# Altium PCB PCB1.PcbDoc
Units mil, origin at the board's own origin, x right, y up, seen from the top; angles counter-clockwise.
Board outline 3300 x 3150 mil, 2 copper layers (Top Layer, Bottom Layer); 7 components, 3 nets, 12 pads, 0 vias.
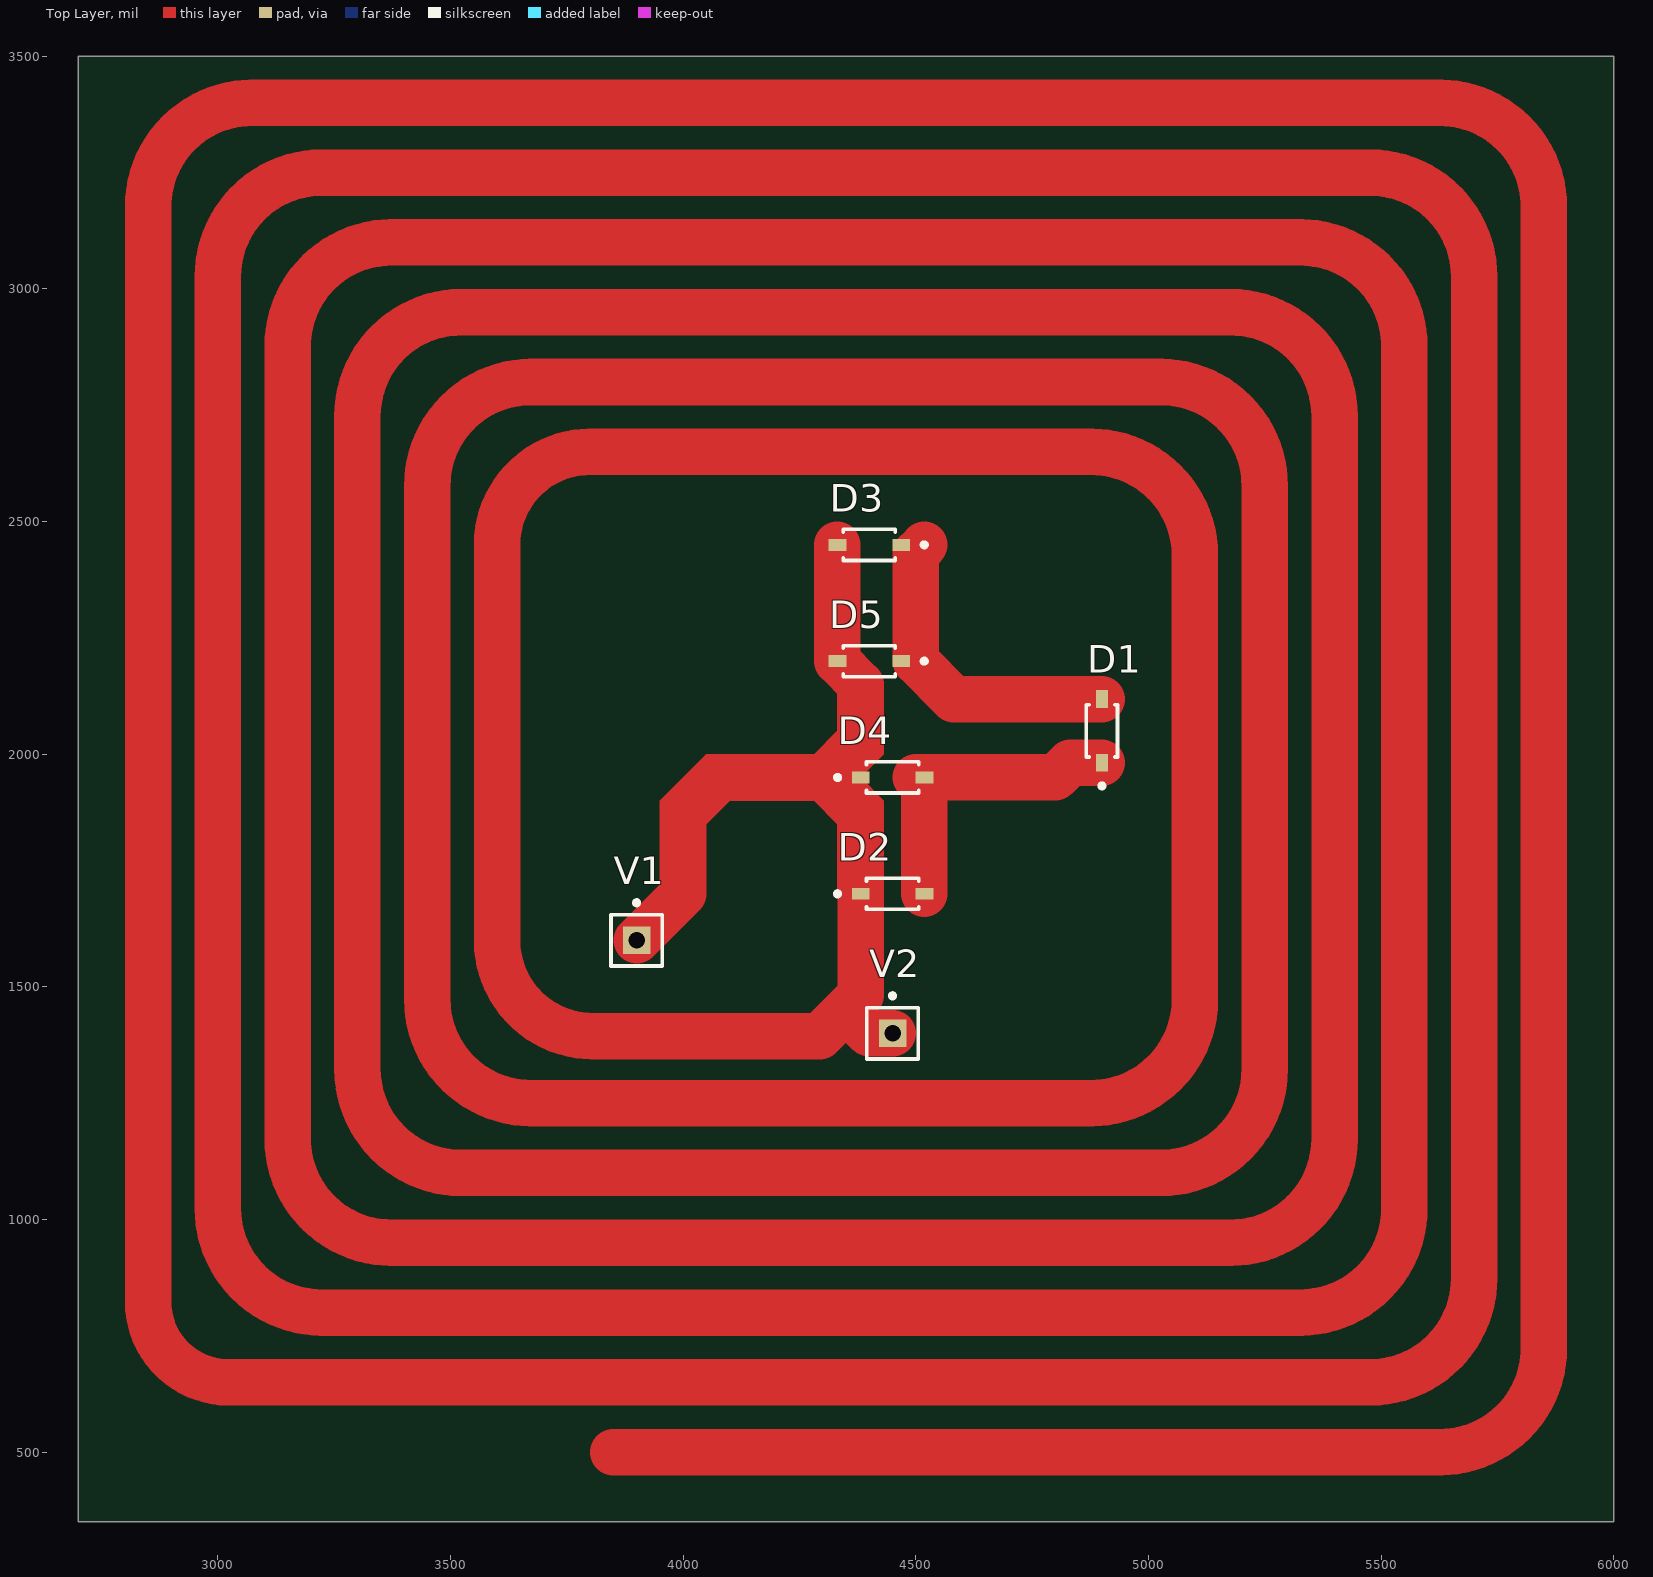
[diagram p0: Top Layer view]
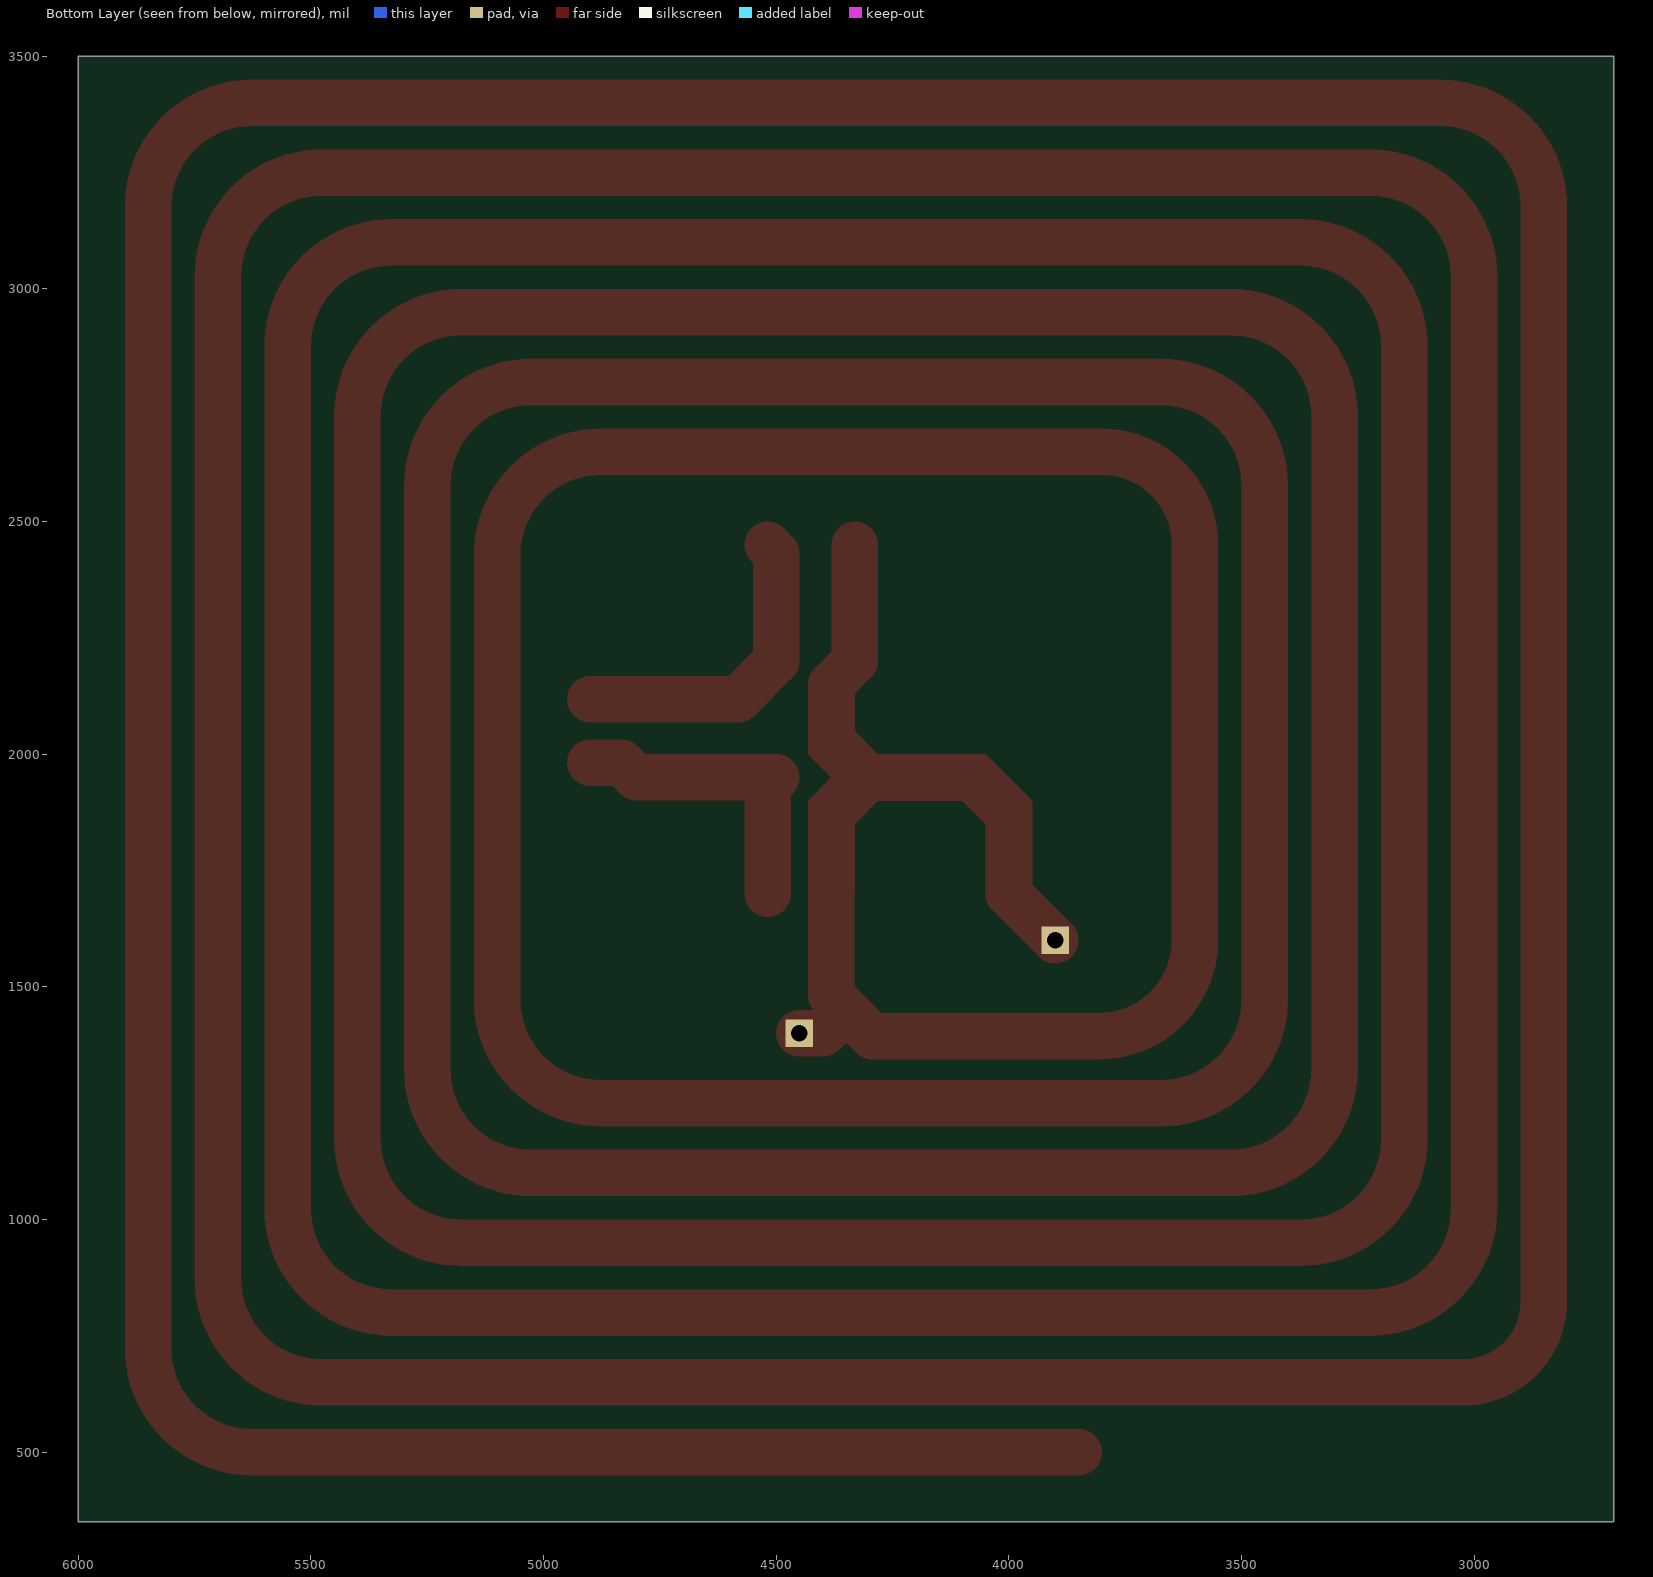
[diagram p1: Bottom Layer view, seen from below]
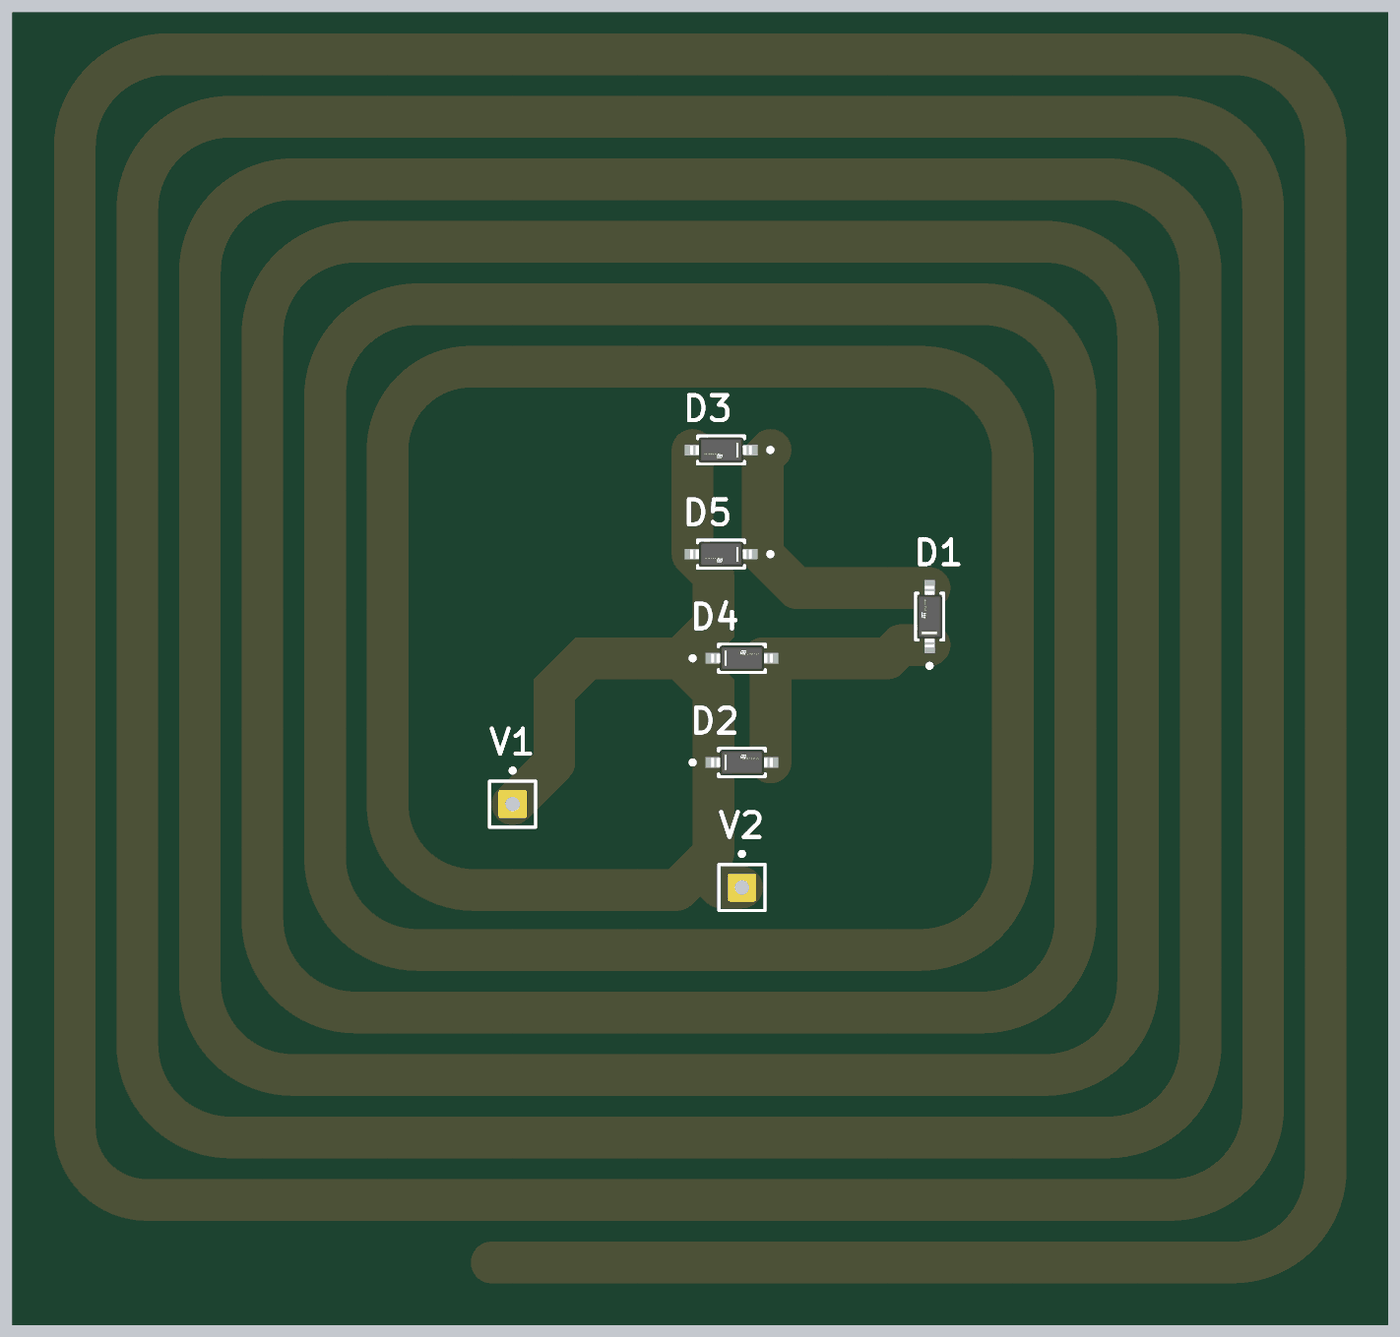
[diagram p2: 3D render of the assembled board from above, using the file's embedded part models]

## Layer stack, top to bottom
Top Solder: solder mask 0.4, Solder Resist, Dk 3.5
Top Layer: signal copper 1.4
Dielectric 1: dielectric 12.6, FR-4, Dk 4.8
Bottom Layer: signal copper 1.4
Bottom Solder: solder mask 0.4, Solder Resist, Dk 3.5

## Board outline
2700,3500 2700,350 6000,350 6000,3500

## Design rules (kind name [scope] priority, off if disabled: settings)
Clearance [All] p1: gap=10 ignorepadtopadclearanceinfootprint=FALSE except(0: Arc-Hole Track-Hole SMDPad-Hole THPad-Hole Via-Hole Fill-Hole Poly-Hole Region-Hole Text-Hole)
PolygonConnect [All] p1: connectstyle=Relief reliefconductorwidth=10 reliefentries=4 polygonreliefangle="90 Angle" airgapwidth=10
RoutingVias [All] p1: holewidth=28 width=50 viastyle="Through Hole" minholewidth=28 minwidth=50 maxholewidth=28 maxwidth=50
SolderMaskExpansion [All] p1: expansion=4 istentingtop=FALSE
Width [All] p1: maxlimit=100 minlimit=10 preferedwidth=10 minimp=50.000000 maximp=50.000000 favimp=50.000000
30 further rules are at their usual default settings.

## Components (designator, comment, footprint, x,y, rotation, side; value= is the part's Value field where it differs from the comment)
D1 "REDLED" FP-SOD-123-MFG 4900,2050 r90 top value=10pF
D2 "BAT46ZFILM" FP-SOD-123-MFG 4450,1700 r0 top value=10pF
D3 "BAT46ZFILM" FP-SOD-123-MFG 4400,2450 r180 top value=10pF
D4 "BAT46ZFILM" FP-SOD-123-MFG 4450,1950 r0 top value=10pF
D5 "BAT46ZFILM" FP-SOD-123-MFG 4400,2200 r180 top value=10pF
V1 "Plug" PIN1 3900,1600 r0 top
V2 "Plug" PIN1 4450,1400 r0 top

## Footprints (in the part's own frame and the unit in brackets; to place one, negate y for a bottom-side part, rotate by r counter-clockwise, add the part's x,y. Pads: shape width x height; smd on the part's side, far side on the other; paste and mask are expansions set on the pad)
FP-SOD-123-MFG [mm]
  rect 0.97x0.65 smd paste+0 mask+0: 1(-1.74,0) 2(1.74,0)
  silkscreen extent -3.12,-0.85 1.43,0.85, body extent -2.32,-0.95 2.32,0.95, height 0.25
PIN1 [mm] "Connector; Plug"
  rect 1.5x1.5 hole 0.9: 1(0,0)
  silkscreen extent -1.4,-1.4 1.4,2.17

## Part data
D1: library part CMP-12187-000006-1, "DIODE SCHOTTKY 100V 150MA SOD123", Capacitance=10pF, Forward Current=150mA, Manufacturer=STMicroelectronics, Manufacturer Part Number=BAT46ZFILM, Max Junction Temp=+150°C, Max Repetitive Reverse Voltage=100V, Max Surge Forward Current=1A, Package=SOD-123, Peak Reverse Current=5uA, Temperature="to +150°C", Automotive=No, Category=Diode, ComponentLink2Description=Datasheet, ComponentLink2URL=https://www.st.com/resource/en/datasheet/bat46.pdf, Device Class L1="Discrete Semiconductors", Device Class L2=Diodes, Device Class L3="Schottky Diodes", Digikey Description="DIODE SCHOTTKY 100V 150MA SOD123", Height=1.45mm, Ipc Land Pattern Name=SOD375155X145-2, Lead Free=Yes, Mouser Description="Schottky Diodes & Rectifiers schottky diode", Octopart=https://octopart.com/bat46zfilm-stmicroelectronics-658190, RoHS=TRUE, Standoff Height=0mm, Temperature Range High=+150°C
D2 D3 D4 D5: library part CMP-12187-000006-1, "DIODE SCHOTTKY 100V 150MA SOD123", Capacitance=10pF, Forward Current=150mA, Manufacturer=STMicroelectronics, Max Junction Temp=+150°C, Max Repetitive Reverse Voltage=100V, Max Surge Forward Current=1A, Package=SOD-123, Peak Reverse Current=5uA, Temperature="to +150°C", Automotive=No, Category=Diode, ComponentLink2Description=Datasheet, ComponentLink2URL=https://www.st.com/resource/en/datasheet/bat46.pdf, Device Class L1="Discrete Semiconductors", Device Class L2=Diodes, Device Class L3="Schottky Diodes", Digikey Description="DIODE SCHOTTKY 100V 150MA SOD123", Height=1.45mm, Ipc Land Pattern Name=SOD375155X145-2, Lead Free=Yes, Manufacturer Part Number=BAT46ZFILM, Mouser Description="Schottky Diodes & Rectifiers schottky diode", Octopart=https://octopart.com/bat46zfilm-stmicroelectronics-658190, RoHS=TRUE, Standoff Height=0mm, Temperature Range High=+150°C
V1 V2: LatestRevisionDate=17-Jul-2002, LatestRevisionNote="Re-released for DXP Platform.", Publisher="Altium Limited"

## Nets (pads, with @x,y where several pads share a name; then routed paths per layer and width w, separated by ;. In a path a pad name is that pad's centre, name@x,y a point inside that pad or via, vN(x,y) a via of type N, cw(c..) or ccw(c..) an arc to the next point about the centre after c; other vN are vias at no path point)
NetD1_1: D1.1 D2.2 D4.2 | length 670.7
  Top Layer w100: D2.2 4518.5,1931.5 4500,1950 D4.2 4800,1950 4831.5,1981.5 D1.1
NetD1_2: D1.2 D3.1 D5.1 | length 691.4
  Top Layer w100: 4518.5,2450 4500,2431.5 4500,2200 4581.5,2118.5 D1.2
NetD2_1: D2.1 D3.2 D4.1 D5.2 V1.1 V2.1 | length 51016.6
  Top Layer w100: 3850,500 5627,500 ccw(c5627,723) 5850,723 5850,3177 ccw(c5627,3177) 5627,3400 3073,3400 ccw(c3073,3177) 2850,3177 2850,823 ccw(c3023,823) 3023,650 5477,650 ccw(c5477,873) 5700,873 5700,3027 ccw(c5477,3027) 5477,3250 3223,3250 ccw(c3223,3027) 3000,3027 3000,1023 ccw(c3223,1023) 3223,800 5327,800 ccw(c5327,1023) 5550,1023 5550,2877 ccw(c5327,2877) 5327,3100 3373,3100 ccw(c3373,2877) 3150,2877 3150,1173 ccw(c3373,1173) 3373,950 5177,950 ccw(c5177,1173) 5400,1173 5400,2727 ccw(c5177,2727) 5177,2950 3523,2950 ccw(c3523,2727) 3300,2727 3300,1323 ccw(c3523,1323) 3523,1100 5027,1100 ccw(c5027,1323) 5250,1323 5250,2577 ccw(c5027,2577) 5027,2800 3673,2800 ccw(c3673,2577) 3450,2577 3450,1473 ccw(c3673,1473) 3673,1250 3950,1250 4877,1250 ccw(c4877,1473) 5100,1473 5100,2427 ccw(c4877,2427) 4877,2650 3800,2650 ccw(c3800,2450) 3600,2450 3600,1600 ccw(c3806,1600) 3806,1394 4294,1394 4350,1450 ; V1.1 4000,1700 ; D3.2 D5.2 4381.5,2150 ; D2.1 4381.5,1481.5 4350,1450 ; V2.1 4400,1400 4350,1450

## Other copper
Top Layer:
  region net NetD2_1: 4431.5,2000 4381.5,1950 4431.5,1900 4431.5,1700 4331.5,1700 4331.5,1850 4281.5,1900 4100,1900 4050,1850 4050,1700 3950,1700 3950,1900 4050,2000 4281.5,2000 4331.5,2050 4331.5,2150 4431.5,2150